# Altium PCB PCB1.PcbDoc
Units mm, origin at the board's own origin, x right, y up, seen from the top; angles counter-clockwise.
Board outline 93.91 x 93.65 mm, 2 copper layers (Top Layer, Bottom Layer); 91 components, 65 nets, 231 pads, 4 vias.
Unrouted connection lines stored in the file: 163.
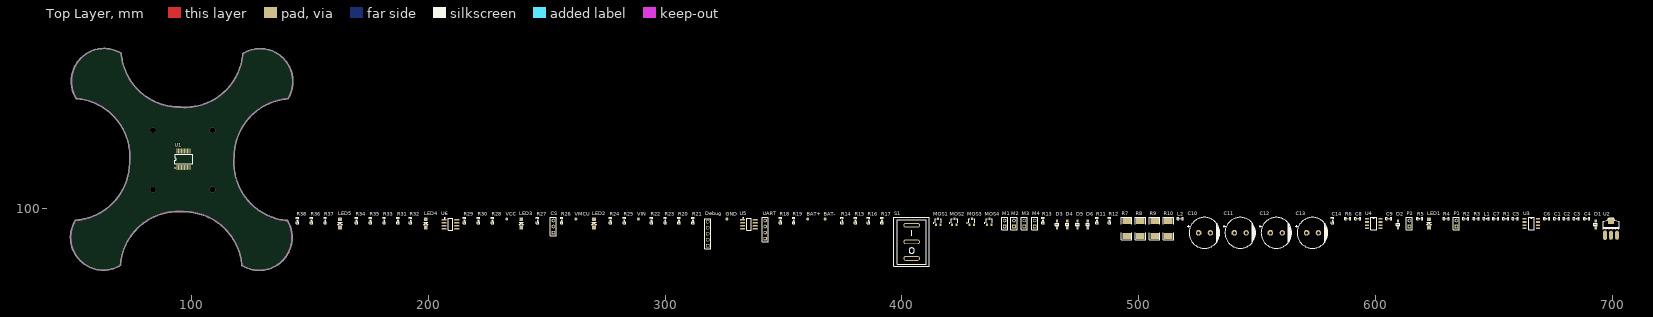
[diagram p0: Top Layer view]
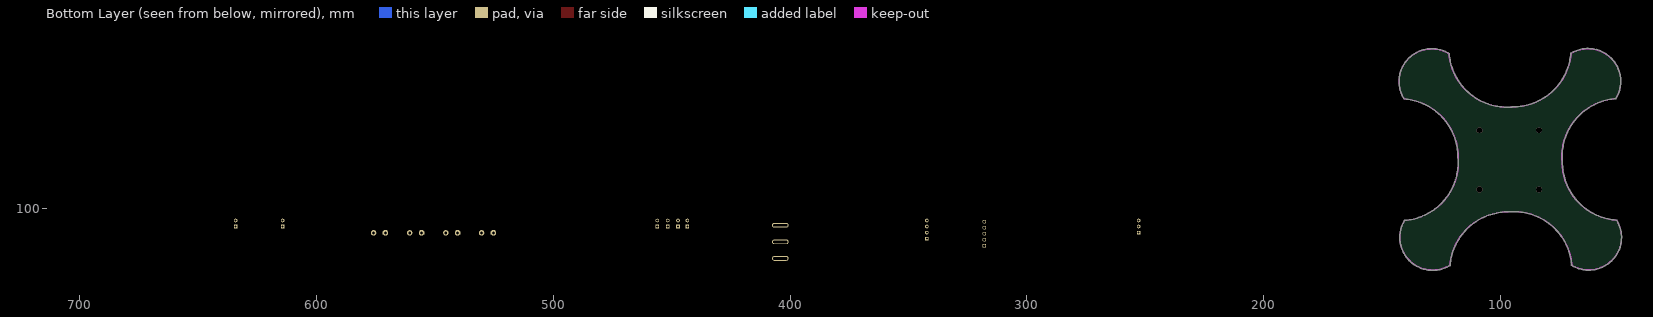
[diagram p1: Bottom Layer view, seen from below]

## Layer stack, top to bottom
Top Solder: solder mask 0.0102, Solder Resist, Dk 3.5
Top Layer: signal copper 0.0356
Dielectric 1: dielectric 0.32, FR-4, Dk 4.8
Bottom Layer: signal copper 0.0356
Bottom Solder: solder mask 0.0102, Solder Resist, Dk 3.5

## Board outline
70.171,75.957 cw(c62.911,87.755) 51.064,94.935 cw(c51.173,94.869) 51.3,94.879 cw(c51.427,94.869) 51.417,94.996 ccw(c49.399,119.511) 73.997,119.511 ccw(c49.399,119.511) 73.996,119.759 cw(c74.123,119.761) 74.048,119.864 ccw(c49.526,121.789) 74.124,121.789 ccw(c49.526,121.789) 51.544,146.304 cw(c51.554,146.431) 51.446,146.364 cw(c63.244,153.624) 70.424,165.471 cw(c70.358,165.362) 70.485,165.372 ccw(c95,167.39) 95.248,142.793 cw(c95.25,142.666) 95.353,142.741 ccw(c97.278,167.263) 121.793,165.245 cw(c121.92,165.235) 121.853,165.343 cw(c129.113,153.545) 142.966,153.545 cw(c129.113,153.545) 140.96,146.365 cw(c140.851,146.431) 140.851,146.304 cw(c140.724,146.304) 140.734,146.177 ccw(c142.752,121.662) 118.155,121.414 cw(c118.028,121.412) 118.155,121.412 cw(c118.028,121.412) 118.103,121.309 ccw(c142.625,119.384) 140.345,94.892 cw(c140.47,94.869) 140.578,94.936 cw(c128.78,87.676) 140.62,94.867 cw(c140.597,94.742) 140.724,94.742 cw(c140.597,94.742) 140.718,94.703 cw(c128.78,87.676) 142.633,87.676 cw(c128.78,87.676) 121.602,75.828 cw(c121.539,75.938) 121.412,75.928 ccw(c96.897,73.91) 96.774,98.508 cw(c96.774,98.635) 96.675,98.555 cw(c96.647,98.679) 96.637,98.552 ccw(c94.619,74.037) 70.116,76.192 cw(c70.104,76.065) 70.231,76.065 cw(c70.104,76.065)

## Design rules (kind name [scope] priority, off if disabled: settings)
Clearance [All] p1: gap=0.1
PolygonConnect [All] p1: connectstyle=Relief reliefconductorwidth=0.254 reliefentries=4 polygonreliefangle="90 Angle" airgapwidth=0.254
RoutingVias [All] p1: holewidth=0.3 width=0.5 viastyle="Through Hole" minholewidth=0.711 minwidth=1.27 maxholewidth=0.711 maxwidth=1.27
SolderMaskExpansion [All] p1: expansion=0.102
Width [All] p1: maxlimit=0.1 minlimit=0.1 preferedwidth=0.1
30 further rules are at their usual default settings.

## Components (designator, comment, footprint, x,y, rotation, side; value= is the part's Value field where it differs from the comment)
BAT+ "SPK+" TP-1.5 360.172,95.504 r90 top
BAT- "SPK+" TP-1.5 367.538,95.504 r90 top
C1 "Cap" 0603P 676.402,95.631 r0 top
C2 "Cap" 0603P 680.339,95.631 r0 top
C3 "Cap" 0603P 684.657,95.631 r0 top
C4 "Cap" 0603P 688.975,95.631 r0 top
C5 "Cap" 0603P 658.876,95.631 r0 top
C6 "Cap" 0603P 672.084,95.631 r0 top
C7 "Cap" 0603P 650.621,95.631 r0 top
C8 "Cap" 0603P 592.455,95.631 r0 top
C9 "Cap" 0603P 605.536,95.631 r0 top
C10 "Cap Pol1" C-RB-5.0/13 527.685,89.662 r0 top
C11 "Cap Pol1" C-RB-5.0/13 542.798,89.662 r0 top
C12 "Cap Pol1" C-RB-5.0/13 558.038,89.662 r0 top
C13 "Cap Pol1" C-RB-5.0/13 573.278,89.662 r0 top
C14 "Cap" 0603P 581.787,94.869 r90 top
CS "Header 3" HDR1X3 252.857,89.789 r90 top
D1 "SS34" SOD-123 692.785,93.218 r90 top
D2 "SS34" SOD-123 609.346,93.218 r90 top
D3 "1N4007" SOD-123 465.455,93.218 r90 top
D4 "1N4007" SOD-123 469.773,93.218 r90 top
D5 "1N4007" SOD-123 474.091,93.218 r90 top
D6 "1N4007" SOD-123 478.409,93.218 r90 top
Debug "Header 5" HDR1X5 318.008,84.201 r90 top
GND "SPK+" TP-1.5 326.136,95.504 r90 top
L1 "47uH" 0603P 646.684,95.631 r0 top
L2 "47uH" 0603P 517.398,95.631 r0 top
LED1 "LED1" LED-1206 622.427,93.599 r90 top
LED2 "LED1" LED-1206 270.002,93.599 r90 top
LED3 "LED1" LED-1206 239.268,93.599 r90 top
LED4 "LED1" LED-1206 199.009,93.599 r90 top
LED5 "LED1" LED-1206 162.814,93.599 r90 top
M1 "Header 2" HDR1X2 443.357,92.329 r90 top
M2 "Header 2" HDR1X2 447.294,92.329 r90 top
M3 "Header 2" HDR1X2 451.612,92.329 r90 top
M4 "Header 2" HDR1X2 456.057,92.329 r90 top
MOS1 "SI2302" SO-G3/C2.5 415.29,94.361 r0 top
MOS2 "SI2302" SO-G3/C2.5 422.148,94.361 r0 top
MOS3 "SI2302" SO-G3/C2.5 429.514,94.361 r0 top
MOS4 "SI2302" SO-G3/C2.5 436.88,94.361 r0 top
P1 "Header 2" HDR1X2 633.984,92.329 r90 top
P2 "Header 2" HDR1X2 614.172,92.329 r90 top
R1 "Res2" 0603P 654.939,95.631 r0 top
R2 "Res2" 0603P 638.048,95.631 r0 top
R3 "Res2" 0603P 642.366,95.631 r0 top
R4 "Res2" 0603P 629.666,95.631 r0 top
R5 "Res2" 0603P 618.49,95.631 r0 top
R6 "Res2" 0603P 588.137,95.631 r0 top
R7 "Res2" 2512 494.792,91.44 r90 top
R8 "Res2" 2512 500.634,91.44 r90 top
R9 "Res2" 2512 506.603,91.44 r90 top
R10 "Res2" 2512 512.445,91.44 r90 top
R11 "Res2" 0603p 482.346,94.869 r90 top
R12 "Res2" 0603p 487.553,94.869 r90 top
R13 "Res2" 0603p 459.486,94.869 r90 top
R14 "Res2" 0603p 374.777,94.869 r90 top
R15 "Res2" 0603p 380.365,94.869 r90 top
R16 "Res2" 0603p 385.953,94.869 r90 top
R17 "Res2" 0603p 391.541,94.869 r90 top
R18 "Res2" 0603p 348.742,94.869 r90 top
R19 "Res2" 0603p 354.33,94.869 r90 top
R20 "Res2" 0603p 305.943,94.869 r90 top
R21 "Res2" 0603p 311.785,94.869 r90 top
R22 "Res2" 0603p 294.259,94.869 r90 top
R23 "Res2" 0603p 300.101,94.869 r90 top
R24 "Res2" 0603p 276.987,94.869 r90 top
R25 "Res2" 0603p 282.829,94.869 r90 top
R26 "Res2" 0603p 256.413,94.869 r90 top
R27 "Res2" 0603p 246.253,94.869 r90 top
R28 "Res2" 0603p 227.203,94.869 r90 top
R29 "Res2" 0603p 215.392,94.869 r90 top
R30 "Res2" 0603p 221.234,94.869 r90 top
R31 "Res2" 0603p 187.325,94.869 r90 top
R32 "Res2" 0603p 192.659,94.869 r90 top
R33 "Res2" 0603p 181.483,94.869 r90 top
R34 "Res2" 0603p 169.799,94.869 r90 top
R35 "Res2" 0603p 175.641,94.869 r90 top
R36 "Res2" 0603p 150.749,94.869 r90 top
R37 "Res2" 0603p 156.591,94.869 r90 top
R38 "Res2" 0603p 144.907,94.869 r90 top
S1 "SW-SPDT" SWITCH_A3 404.114,85.852 r90 top
U1 "N76E003" SSOP-20_208mil 96.901,120.777 r0 top
U2 "AMS1117-5.0" AMS1117 696.722,88.646 r0 top
U3 "MP2307" SOP-8 662.813,95.504 r0 top
U4 "MP2307" SOP-8 596.265,95.504 r0 top
U5 "LM358" SOIC-8 335.407,93.218 r0 top
U6 "LM358" SOIC-8 209.423,93.218 r0 top
UART "Header 4" HDR1X4 342.265,87.249 r90 top
VCC "SPK+" TP-1.5 233.172,95.504 r90 top
VIN "SPK+" TP-1.5 288.798,95.504 r90 top
VMCU "SPK+" TP-1.5 262.382,95.504 r90 top

## Footprints (in the part's own frame and the unit in brackets; to place one, negate y for a bottom-side part, rotate by r counter-clockwise, add the part's x,y. Pads: shape width x height; smd on the part's side, far side on the other; paste and mask are expansions set on the pad)
0603P [mil]
  rect 30x30 smd: 1(-27,0) 2(27.5,-0.06)
  silkscreen extent -50,-20 50,20
0603p [mil]
  rect 30x30 smd: 1(-27,0) 2(27.5,-0.06)
  silkscreen extent -50,-20 50,20
2512 [mm] "贴片元件"
  rect 2.5x3.6 smd: 1(-3.175,0) 2(3.175,0)
  silkscreen extent -4.7,-2.2 4.7,2.2, body extent -3.17,-1.65 3.17,1.65, height 1.2
AMS1117 [mil]
  oct 65x150 smd: 1(0.03,-0.06)
  oval 65x150 smd: 2(100.03,-0.06) 3(200.03,-0.06)
  rect 100x100 smd: 4(100.03,239.94)
  silkscreen extent -26,100 234,293
C-RB-5.0/13 [mm] "插件电解电容"
  oct 2.3x2.3 hole 1.2: 1(-2.5,0)
  round 2.3 hole 1.2: 2(2.5,0)
  silkscreen extent -7.24,-6.5 6.5,6.5
HDR1X2 [mm] "Connector; Header; 2 Position"
  rect 1.5x1.5 hole 0.9: 1(0,0)
  round 1.5 hole 0.9: 2(2.54,0)
  silkscreen extent -1.27,-1.27 3.81,1.27
HDR1X3 [mm] "Connector; Header; 3 Position"
  rect 1.5x1.5 hole 0.9: 1(0,0)
  round 1.5 hole 0.9: 2(2.54,0) 3(5.08,0)
  silkscreen extent -1.27,-1.27 6.35,1.27
HDR1X4 [mm] "Connector; Header; 4 Position"
  rect 1.5x1.5 hole 0.9: 1(0,0)
  round 1.5 hole 0.9: 2(2.54,0) 3(5.08,0) 4(7.62,0)
  silkscreen extent -1.27,-1.27 8.89,1.27
HDR1X5 [mm] "Connector; Header; 5 Position"
  rect 1.5x1.5 hole 0.9: 1(0,0)
  round 1.5 hole 0.9: 2(2.54,0) 3(5.08,0) 4(7.62,0) 5(10.16,0)
  silkscreen extent -1.27,-1.27 11.43,1.27
LED-1206 [mil] "贴片元件"
  rect 60x60 smd: 1(-70,0) 2(70,0)
  silkscreen extent -20,-35 20,35, body extent -75,-35 75,35, height 39
SO-G3/C2.5 [mm]
  rect 0.9x0.95 smd: 1(-0.95,-1.25) 2(0.95,-1.25) 3(0,1.25)
  silkscreen extent -2.15,-0.63 1.3,1.25
SOD-123 [mm]
  rect 1.25x1 smd: 1(1.475,0) 2(-1.475,0)
  silkscreen extent -0.5,-0.7 0.5,0.7, body extent -1.85,-0.77 1.85,0.78, height 1.35
SOIC-8 [mm]
  oval 2.2x0.6 smd: 1(-2.654,1.905) 2(-2.654,0.635) 3(-2.654,-0.635) 4(-2.654,-1.905) 5(2.654,-1.905) 6(2.654,-0.635) 7(2.654,0.635) 8(2.654,1.905)
  silkscreen extent -2.52,-2.5 0.9,2.88, body extent -3,-2.45 3,2.45, height 1.7
SOP-8 [mil]
  rect 65x25 smd: 1(0,0) 2(0,-50) 3(0,-100) 4(0,-150) 5(224.41,-150) 6(224.41,-100) 7(224.41,-50) 8(224.41,0)
  silkscreen extent 65,-175 159,25
SSOP-20_208mil [mm]
  oval 0.4x2.1 smd mask+0.051: 1(-2.925,-3.45) 2(-2.275,-3.45) 3(-1.625,-3.45) 4(-0.975,-3.45) 5(-0.325,-3.45) 6(0.325,-3.45) 7(0.975,-3.45) 8(1.625,-3.45) 9(2.275,-3.45) 10(2.925,-3.45) 11(2.925,3.45) 12(2.275,3.45) 13(1.625,3.45) 14(0.975,3.45) 15(0.325,3.45) 16(-0.325,3.45) 17(-0.975,3.45) 18(-1.625,3.45) 19(-2.275,3.45) 20(-2.925,3.45)
  silkscreen extent -3.85,-3.86 3.75,2
SWITCH_A3 [mm] "单刀单掷开关"
  oval 2x7 hole 1 slot 6 at 90 deg: 1(-6.985,0) 2(0,0) 3(6.985,0)
  silkscreen extent -10.29,-7.49 10.29,7.49
TP-1.5 [mm]
  round 1.2 smd: 1(0,0)

## Part data
BAT+ BAT- GND VCC VIN VMCU: library part TEST-POINT, "测试点"
C1 C2 C3 C4 C5 C6 C7 C8 C9 C14: "Capacitor"
C10 C11 C12 C13: "Polarized Capacitor (Radial)"
CS: "Header, 3-Pin"
D1 D2 D3 D4 D5 D6: library part D
Debug: "Header, 5-Pin"
L1 L2: library part L
LED1 LED2 LED3 LED4 LED5: library part LED2, "Typical RED, GREEN, YELLOW, AMBER GaAs LED"
M1 M2 M3 M4 P1 P2: "Header, 2-Pin"
MOS1 MOS2 MOS3 MOS4: library part MOS-P, "IRLML6401/SI2301"
R1 R2 R3 R4 R5 R6 R7 R8 R9 R10 R11 R12 R13 R14 R15 R16 R17 R18 R19 R20 R21 R22 R23 R24 R25 R26 R27 R28 R29 R30 R31 R32 R33 R34 R35 R36 R37 R38: "Resistor"
S1: "开关"
U2: library part AMS1117
U5 U6: "双运放"
UART: "Header, 4-Pin"

## Via types
v1: diameter 2.5, hole 2.5, Top Layer to Bottom Layer, 4 vias

## Nets (pads, with @x,y where several pads share a name; then routed paths per layer and width w, separated by ;. In a path a pad name is that pad's centre, name@x,y a point inside that pad or via, vN(x,y) a via of type N, cw(c..) or ccw(c..) an arc to the next point about the centre after c; other vN are vias at no path point)
AIN4: R24.2 U1.1 U5.1
AIN5: R36.2 U1.20 U6.1
AIN6: R25.2 U1.19 U5.7
AIN7: R37.2 U1.14 U6.7
CS: CS.2 U1.5
EN1: R1.2 U3.7
EN2: R6.2 U4.7
FB1: R2.1 R4.2 U3.5
FB2: R11.1 R13.2 U4.5
GND: BAT-.1 C1.1 C2.1 C3.1 C4.1 C6.2 C9.2 C10.2 C11.2 C12.2 C13.2 CS.1 D1.1 D2.1 Debug.1 GND.1 LED1.2 MOS1.2 MOS2.2 MOS3.2 MOS4.2 R3.1 R4.1 R12.1 R13.1 R18.2 R19.2 R29.2 R30.2 U1.7 U2.1 U3.4 U4.4 U6.4 UART.1
ICPCK: Debug.3 P1.2 U1.18
ICPDA: Debug.4 P2.1 U1.8
LED0: LED2.2 U1.6
LED1: LED3.2 U1.10
LED2: LED4.2 P2.2
LED3: LED5.2 P1.1
NetBAT+_1: BAT+.1 S1.2
NetC5_1: C5.1 U3.1
NetC5_2: C5.2 D1.2 L1.1 U3.3
NetC6_1: C6.1 U3.8
NetC7_1: C7.1 R3.2
NetC7_2: C7.2 U3.6
NetC8_1: C8.1 U4.1
NetC8_2: C8.2 D2.2 L2.1 U4.3
NetC9_1: C9.1 U4.8
NetC14_1: C14.1 R12.2
NetC14_2: C14.2 U4.6
NetCS_3: CS.3 R27.1
NetD3_1: D3.1 M1.2 MOS1.3
NetD4_1: D4.1 M2.2 MOS2.3
NetD5_1: D5.1 M3.2 MOS3.3
NetD6_1: D6.1 M4.2 MOS4.3
NetLED1_1: LED1.1 R5.2
NetLED2_1: LED2.1 R26.2
NetLED3_1: LED3.1 R28.2
NetLED4_1: LED4.1 R33.2
NetLED5_1: LED5.1 R38.2
NetMOS1_1: MOS1.1 R14.2
NetMOS2_1: MOS2.1 R15.2
NetMOS3_1: MOS3.1 R16.2
NetMOS4_1: MOS4.1 R17.2
NetR18_1: R18.1 R20.2 U5.3
NetR19_1: R19.1 R21.2 U5.5
NetR22_2: R22.2 R24.1 U5.2
NetR23_2: R23.2 R25.1 U5.6
NetR29_1: R29.1 R31.2 U6.3
NetR30_1: R30.1 R32.2 U6.5
NetR34_2: R34.2 R36.1 U6.2
NetR35_2: R35.2 R37.1 U6.6
PWM0: R14.1 U1.13
PWM2: R15.1 U1.15
PWM3: R16.1 U1.16
PWM4: R17.1 U1.17
RST: Debug.2 U1.4
RXD: U1.3 UART.2
SA1: C10.1 C11.1 C12.1 C13.1 D3.2 D4.2 D5.2 D6.2 L1.2 L2.2 R2.2 R7.1 R8.1 R9.1 R10.1 R11.2 R20.1 R21.1 R26.1 R28.1 R31.1 R32.1 R33.1 R38.1 VCC.1
SA2: M1.1 R7.2 R22.1
SA4: M2.1 R8.2 R34.1
SA6: M3.1 R9.2 R23.1
SA8: M4.1 R10.2 R35.1
SCL: U1.12
SDA: U1.11
TXD: U1.2 UART.3
VIN: C1.2 C2.2 R1.1 R6.1 S1.1 U2.3 U3.2 U4.2 VIN.1
VMCU: C3.2 C4.2 Debug.5 R5.1 R27.2 U1.9 U2.2 U2.4 U6.8 UART.4 VMCU.1
pads on no net: S1.3 U5.4 U5.8
copper on no net:
  other v1: 83.947,107.95 108.966,107.95 83.947,132.969 108.966,132.969

## Keep-outs
Keep-Out Layer:
  lines w0.254: 51.173,94.869 ccw(c62.911,87.755) 70.104,76.065 ; 51.427,94.869 ccw(c49.399,119.511) 74.123,119.761 ; 69.977,76.065 cw(c94.619,74.037) 96.647,98.679 ; 74.168,119.761 ccw(c49.526,121.789) 51.554,146.431 cw(c63.244,153.624) 70.358,165.362 ccw(c95,167.39) 95.25,142.666 ; 95.25,142.621 ccw(c97.278,167.263) 121.92,165.235 cw(c129.113,153.545) 140.851,146.431 ; 96.774,98.635 cw(c96.897,73.91) 121.539,75.938 ; 117.983,121.412 ccw(c142.625,119.384) 140.597,94.742 ; 118.028,121.412 cw(c142.752,121.662) 140.724,146.304 ; 121.666,75.938 ccw(c128.78,87.676) 140.47,94.869

## Silkscreen, mask and mechanical layers (free items; w line width, h text height)
Drill Drawing:
  text ".LEGEND" at 145.88,81.28 h1.52
  text "Drill Drawing." at 145.88,78.74 h1.52